# EAGLE board hw2 (EAGLE 8.7.1)
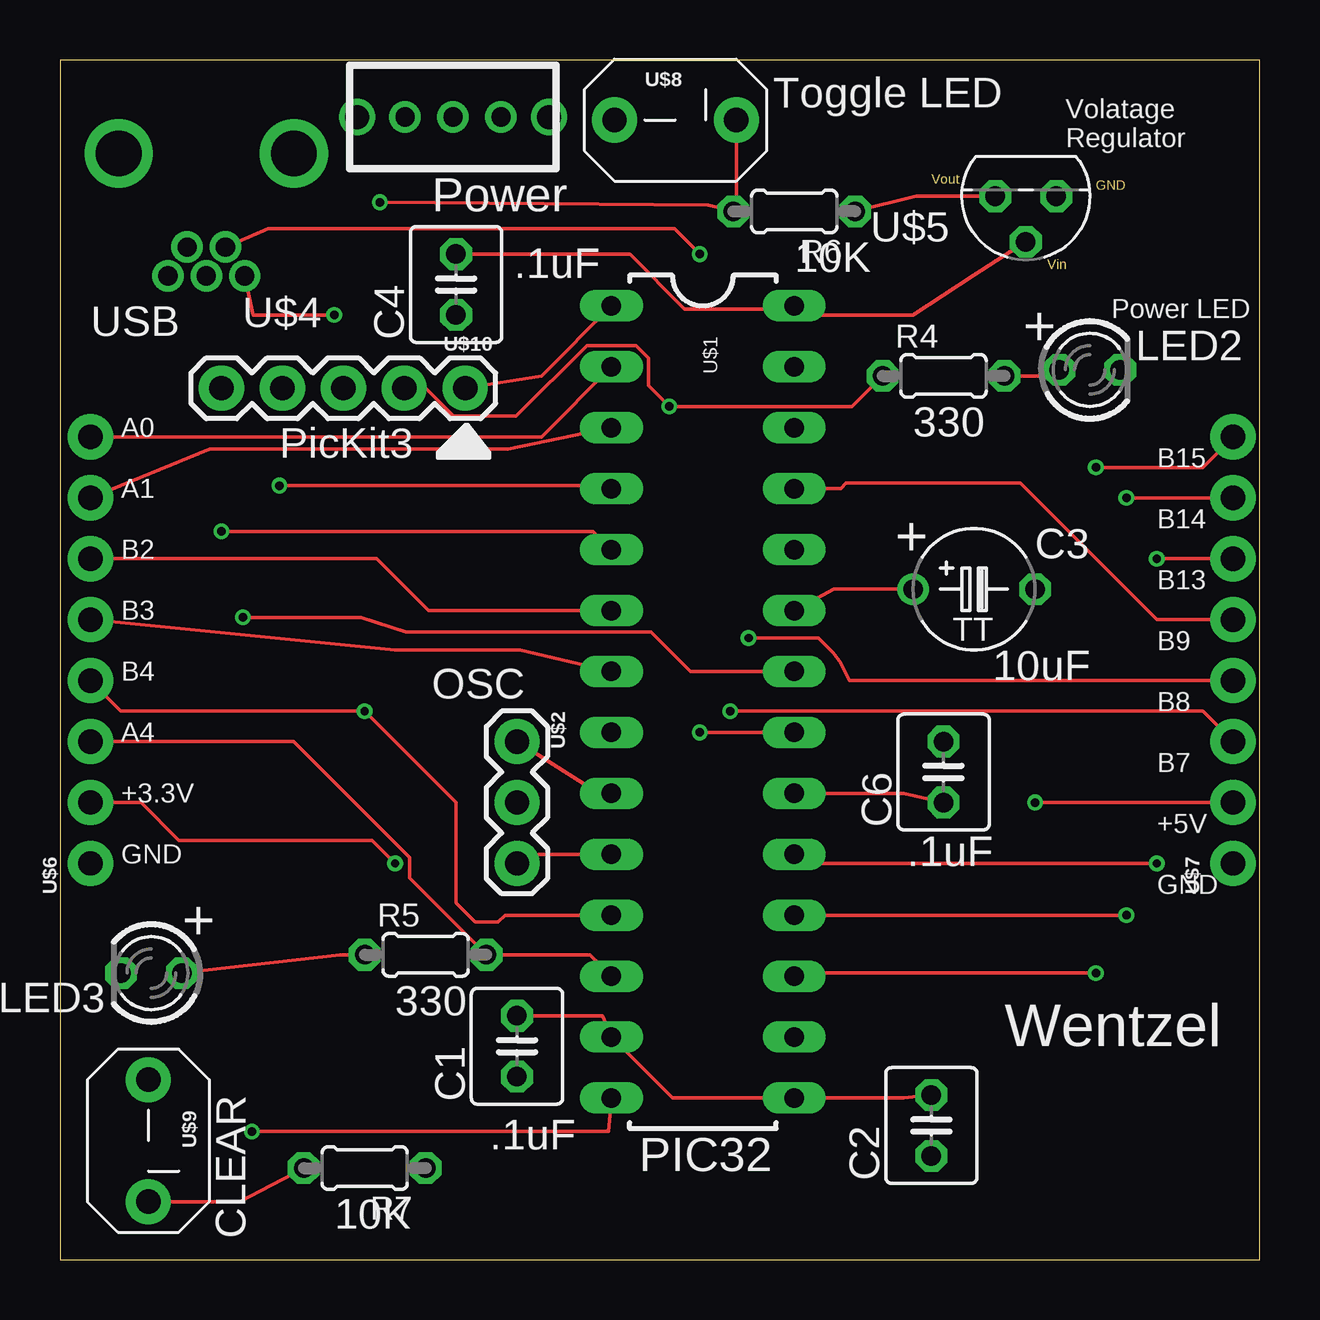
[diagram p0: board, top side]
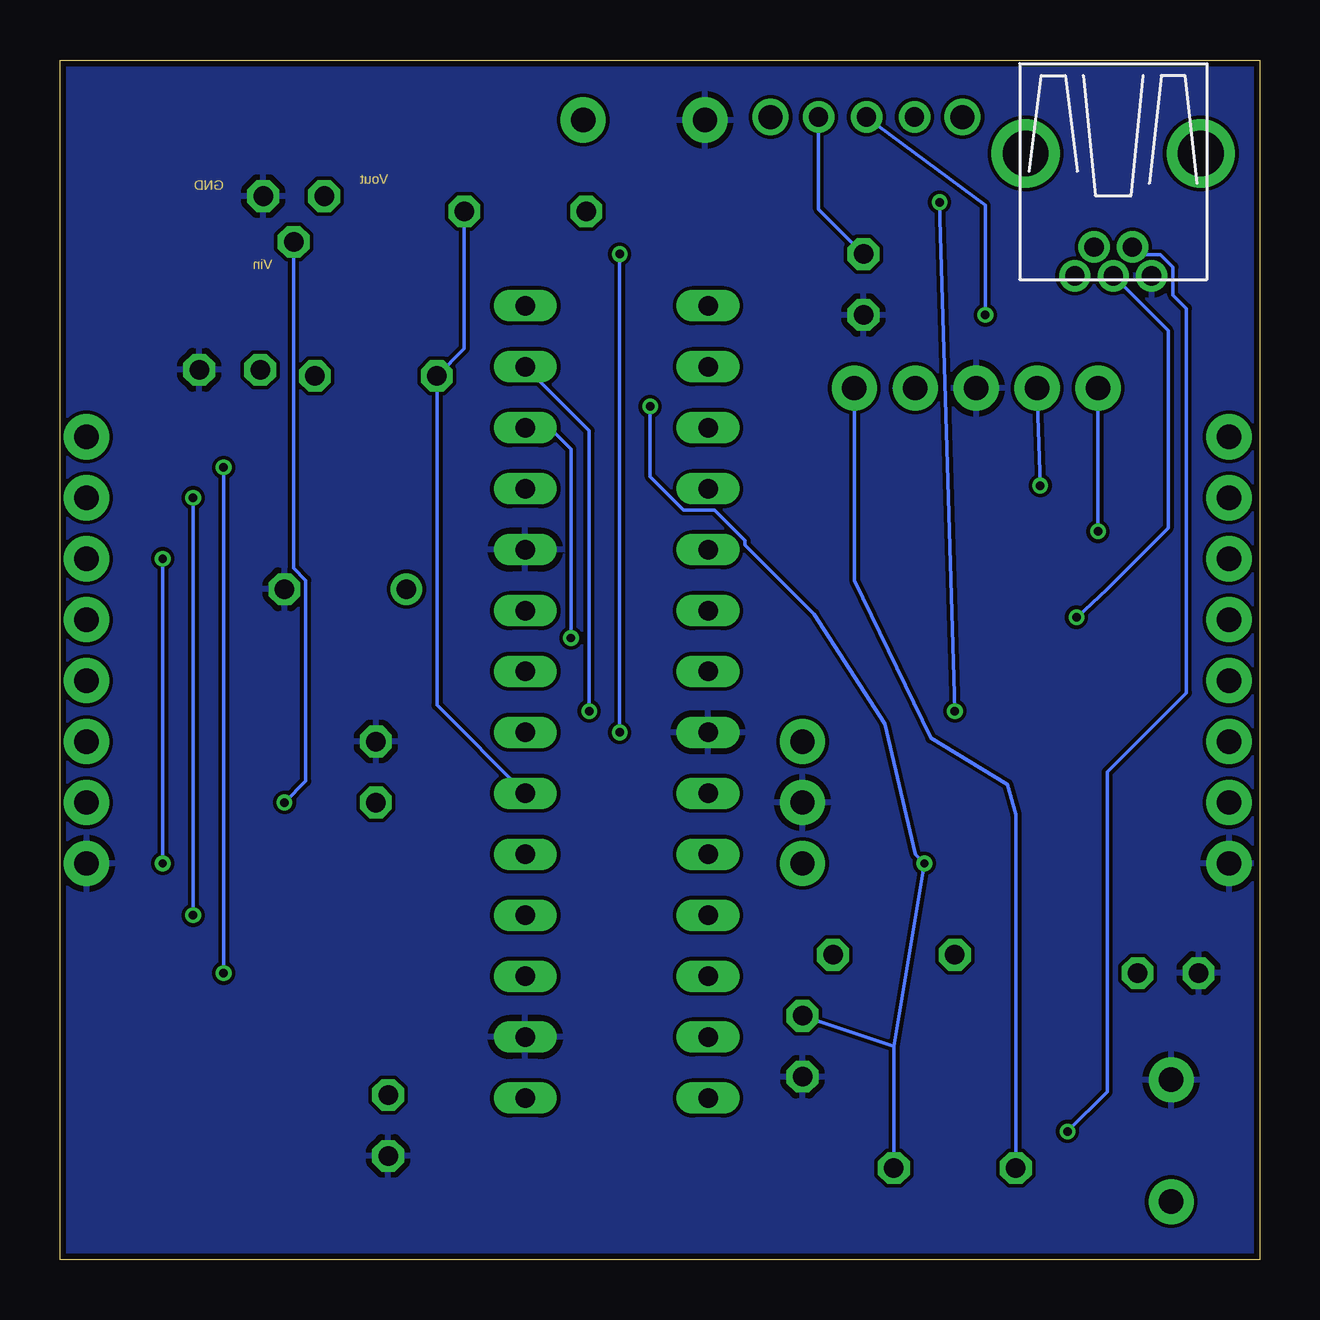
[diagram p1: board, bottom side, seen from below]

Size 50 x 50 mm. Coordinates in mm from the lower left corner, seen from the top.
Outline: 0,0 50,0 50,50 0,50 0,0
Copper layers (1*16): Top 0.035mm / dielectric 1.5mm / Bottom 0.035mm
Design rules "SeeedStudio_2layer_DRU_no_angle_20140221": minimum track width 6mil, minimum drill 12mil, track to track 6mil, track to pad 6mil, pad to pad 6mil, via to via 6mil, smd to smd 0mil, copper to edge 10mil, drill to drill 10mil, minimum pad ring 10mil, minimum via ring 6mil, stop-mask expansion 2mil, vias tented up to drill 100mil, thermal gap 10mil

## Footprints (pad centres in the part's own frame; a part is rotated, then mirrored left to right if it is on the bottom)
C025-040X050 = drill 0.813 octagon: 1 -1.27,0; 2 1.27,0
TAP5-50 = drill 0.813: + -2.54,0 | drill 0.813 octagon: - 2.54,0
LED3MM = drill 0.813 octagon: A -1.27,0; K 1.27,0
0204/5 = drill 0.813 octagon: 1 -2.54,0; 2 2.54,0
DIL28-3 = drill 0.813 long: 1 -16.51,-3.81; 2 -13.97,-3.81; 3 -11.43,-3.81; 4 -8.89,-3.81; 5 -6.35,-3.81; 6 -3.81,-3.81; 7 -1.27,-3.81; 8 1.27,-3.81; 9 3.81,-3.81; 10 6.35,-3.81; 11 8.89,-3.81; 12 11.43,-3.81; 13 13.97,-3.81; 14 16.51,-3.81; 15 -16.51,3.81; 16 -13.97,3.81; 17 -11.43,3.81; 18 -8.89,3.81; 19 -6.35,3.81; 20 -3.81,3.81; 21 -1.27,3.81; 22 1.27,3.81; 23 3.81,3.81; 24 6.35,3.81; 25 8.89,3.81; 26 11.43,3.81; 27 13.97,3.81; 28 16.51,3.81
1X03 = drill 1.016 pad 1.88: 1 0,0; 2 2.54,0; 3 5.08,0
SLIDESWITCH = drill 1: P$4 -4,0; P$5 4,0 | drill 0.8: PIN1 -2,0; PIN2 0,0; PIN3 2,0
USB-MB-H = drill 0.8: D+ 5.1,0; D- 3.9,0.8; GND 5.1,-1.6; ID 3.9,-0.8; VBUS 5.1,1.6 | drill 1.9: P$6 0,-3.65; P$7 0,3.65
TO92 = drill 0.813 octagon: 1 -1.27,0; 2 0,1.905; 3 1.27,0
1X08 = drill 1.016 pad 1.88: 1 0,0; 2 2.54,0; 3 5.08,0; 4 7.62,0; 5 10.16,0; 6 12.7,0; 7 15.24,0; 8 17.78,0
SWITCH = drill 1.016 pad 1.88: 1 -2.54,0; 2 2.54,0
1X05 = drill 1.016 pad 1.88: 1 0,0; 2 2.54,0; 3 5.08,0; 4 7.62,0; 5 10.16,0

## Placement (x,y rotation side)
C1  .1uF  [C025-040X050]  19.05,8.89 90 top
C2  .1uF  [C025-040X050]  36.32,5.59 90 top
C3  10uF  [TAP5-50]  38.1,27.94 0 top
C4  .1uF  [C025-040X050]  16.51,40.64 90 top
C6  .1uF  [C025-040X050]  36.83,20.32 90 top
LED2  [LED3MM]  42.93,37.08 0 top
LED3  [LED3MM]  3.81,11.94 180 top
R4  330  [0204/5]  36.83,36.83 0 top
R5  330  [0204/5]  15.24,12.7 0 top
R6  10k  [0204/5]  30.61,43.69 180 top
R7  10k  [0204/5]  12.7,3.81 180 top
U$1  PIC32MX250F128B  [DIL28-3]  26.8,23.24 270 top
U$2  OSC  [1X03]  19.05,21.59 270 top
U$3  SLIDESWITCH  [SLIDESWITCH]  16.38,47.62 0 top
U$4  USBCONNECTOR  [USB-MB-H]  6.1,46.1 270 top
U$5  MCP1702  [TO92]  40.26,44.32 180 top
U$6  CONN_8  [1X08]  1.27,16.51 90 top
U$7  CONN_8  [1X08]  48.9,16.51 90 top
U$8  SWITCH  [SWITCH]  25.65,47.5 0 top
U$9  SWITCH  [SWITCH]  3.68,4.95 270 top
U$10  PICKIT_HEADER  [1X05]  16.89,36.32 180 top

## Library data of the parts
C1-C4 C6 = hw2; SPICEPREFIX: C
LED2 LED3 R4-R7 U$1-U$10 = hw2

## Nets
14USBID/RB5: U$1.14 U$4.ID
21D+/RB10: U$1.21 U$4.D+
22D-/RB11: U$1.22 U$4.D-
!MCLR: R7.2 U$1.1 U$9.2 U$10.1
+3V3: C1.2 C2.2 C6.1 R4.1 R6.1 R7.1 U$1.13 U$1.23 U$1.28 U$5.3 U$6.2 U$10.2
+5V: C4.2 U$1.15 U$3.PIN3 U$5.2 U$7.2
GND: C1.1 C2.1 C3.- C4.1 C6.2 LED2.K LED3.K U$1.8 U$1.19 U$1.27 U$2.2 U$4.GND U$5.1 U$6.1 U$7.1 U$8.1 U$9.1 U$10.3
N$1: U$1.10 U$2.3
N$2: U$1.9 U$2.1
N$19: C3.+ U$1.20
N$37: LED2.A R4.2
N$39: LED3.A R5.1
RA0: U$1.2 U$6.8
RA1: U$1.3 U$6.7
RA4: R5.2 U$1.12 U$6.3
RB0: U$1.4 U$10.4
RB1: U$1.5 U$10.5
RB2: U$1.6 U$6.6
RB3: U$1.7 U$6.5
RB4: R6.2 U$1.11 U$6.4 U$8.2
RB7: U$1.16 U$7.3
RB8: U$1.17 U$7.4
RB9: U$1.18 U$7.5
RB13: U$1.24 U$7.6
RB14: U$1.25 U$7.7
RB15: U$1.26 U$7.8
VBUS: U$3.PIN2 U$4.VBUS

## Tracks (layer width: path | path; a pad name or v marks a point on that pad's centre or on a via)
14USBID/RB5  (via drill 0.35)
  Top 0.152: v8,5.33 22.86,5.33 U$1.14
  Bottom 0.152: U$4.ID 4.98,41.88 4.13,41.88 3.61,41.37 3.61,40.2 3.05,39.64 3.05,23.62 6.35,20.32 6.35,6.99 v8,5.33
21D+/RB10  (via drill 0.35)
  Top 0.152: v7.63,26.77 12.55,26.77 14.43,26.16 24.64,26.16 26.29,24.51 U$1.21
  Bottom 0.152: v7.63,26.77 v7.62,26.76 6.35,27.94 6.1,28.19 3.81,30.48 3.81,38.72 U$4.D+
22D-/RB11  (via drill 0.35)
  Top 0.152: v26.67,21.97 U$1.22 | 26.38,42.2 v26.67,41.91 25.62,42.96 8.69,42.96 U$4.D-
  Bottom 0.152: v26.67,41.91 v26.67,21.97
!MCLR
  Top 0.152: U$9.2 7.49,2.41 R7.2 | 22.61,39.37 U$1.1 20.07,36.83 U$10.1
  Bottom 0.152: R7.2 10.16,18.54 10.51,19.81 13.7,21.73 16.88,28.31 U$10.1
+3V3  (via drill 0.35)
  Top 0.152: C2.2 35.18,6.73 U$1.28 25.53,6.73 U$1.13 22.61,10.16 C1.2 | U$1.23 35.18,19.43 C6.1 | U$5.3 35.69,44.32 R6.1 | U$6.2 3.38,19.05 4.95,17.48 13.01,17.48 v13.97,16.51 | R4.1 33.02,35.56 v25.4,35.56 24.54,36.42 24.54,37.58 24.02,38.1 21.96,38.1 19.01,35.15 16.41,35.15 15.24,36.32 U$10.2
  Bottom 0.152: R6.1 33.15,37.97 R4.1 34.29,23.11 U$1.23 | 15.24,8.89 v13.97,16.51 14.35,16.89 15.62,22.32 18.57,26.92 21.44,29.79 21.44,29.96 22.72,31.24 24.02,31.24 25.4,32.63 v25.4,35.56 | 15.24,8.89 R7.1 | C1.2 15.24,8.89 | 15.24,36.32 U$10.2
+5V  (via drill 0.35)
  Top 0.152: U$5.2 38.1,41.02 35.56,39.37 30.99,39.37 30.73,39.62 | 30.73,39.62 U$1.15 | C4.2 17.34,41.91 17.35,41.9 23.76,41.9 26.04,39.62 30.73,39.62 | U$7.2 v40.64,19.05
  Bottom 0.152: C4.2 18.38,43.78 U$3.PIN3 | U$5.2 40.26,28.82 39.75,28.31 39.75,19.94 v40.64,19.05
GND
  pour Bottom: 0,0 50,0 50,50 0,50
N$1
  Top 0.152: U$2.3 19.94,16.89 U$1.10
N$2
  Top 0.152: U$2.1 22.48,19.43 U$1.9
N$19
  Top 0.152: C3.+ 32.26,27.94 U$1.20
N$37
  Top 0.152: R4.2 41.4,36.83 LED2.A
N$39
  Top 0.152: LED3.A 11.68,12.7 R5.1
RA0
  Top 0.152: U$6.8 20.07,34.29 U$1.2
RA1
  Top 0.152: U$1.3 18.67,33.78 6.24,33.78 U$6.7
RA4
  Top 0.152: U$1.12 22.1,12.7 R5.2 14.58,15.9 14.58,16.76 9.75,21.59 U$6.3
RB0  (via drill 0.35)
  Top 0.152: v9.14,32.26 22.86,32.26 U$1.4
  Bottom 0.152: U$10.4 v9.14,32.26 9.27,32.13
RB1  (via drill 0.35)
  Top 0.152: v6.73,30.35 22.23,30.35 U$1.5
  Bottom 0.152: U$10.5 v6.73,30.35
RB2
  Top 0.152: U$6.6 13.21,29.21 15.37,27.05 U$1.6
RB3
  Top 0.152: U$6.5 13.97,25.4 19.18,25.4 U$1.7
RB4  (via drill 0.35)
  Top 0.152: U$6.4 2.54,22.86 v12.7,22.86 16.51,19.05 16.51,14.86 17.3,14.07 18.26,14.07 18.54,14.35 U$1.11 | U$8.2 28.19,43.81 R6.2 27.04,43.94 v13.34,44.07
  Bottom 0.152: v13.34,44.07 v12.7,22.86
RB7  (via drill 0.35)
  Top 0.152: U$7.3 47.62,22.86 v27.94,22.86
  Bottom 0.152: v27.94,22.86 27.94,34.54 U$1.16
RB8  (via drill 0.35)
  Top 0.152: v28.7,25.91 31.61,25.91 32.24,25.27 32.52,24.89 32.91,24.13 U$7.4
  Bottom 0.152: v28.7,25.91 28.7,33.78 29.59,34.67 U$1.17
RB9
  Top 0.152: U$7.5 45.72,26.67 40.03,32.36 32.77,32.36 32.54,32.13 U$1.18
RB13  (via drill 0.35)
  Top 0.152: U$7.6 v45.72,29.21 | v45.72,16.51 30.99,16.51 U$1.24
  Bottom 0.152: v45.72,29.21 v45.72,16.51
RB14  (via drill 0.35)
  Top 0.152: U$7.7 v44.45,31.75 | v44.45,14.35 U$1.25
  Bottom 0.152: v44.45,31.75 v44.45,14.35
RB15  (via drill 0.35)
  Top 0.152: U$7.8 47.62,33.02 v43.18,33.02 | v43.18,11.94 30.73,11.94 U$1.26
  Bottom 0.152: v43.18,33.02 v43.18,11.94 43.31,11.81
VBUS  (via drill 0.35)
  Top 0.152: U$4.VBUS 8.06,39.37 v11.43,39.37
  Bottom 0.152: v11.43,39.37 11.43,43.94 U$3.PIN2

## Text on the board
Dimension: Vout | GND | Vin
tPlace: 10K
tNames: Toggle LED | Volatage / Regulator | Power | .1uF | 10K | Power LED | USB | + | A0 | 330 | PicKit3 | B15 | A1 | B14 | B2 | + | B13 | B3 | B9 | B4 | 10uF | OSC | B8 | A4 | B7 | +3.3V | +5V | GND | .1uF | GND | + | 330 | Wentzel | .1uF | PIC32 | CLEAR